# Altium PCB PCB1.PcbDoc (part 2 of 4)
Units mil, origin at the board's own origin, x right, y up, seen from the top; angles counter-clockwise.
Board outline 4724.41 x 4724.41 mil, 4 copper layers (Top Layer, GND, VCC, Bottom Layer); 291 components, 240 nets, 990 pads, 328 vias.
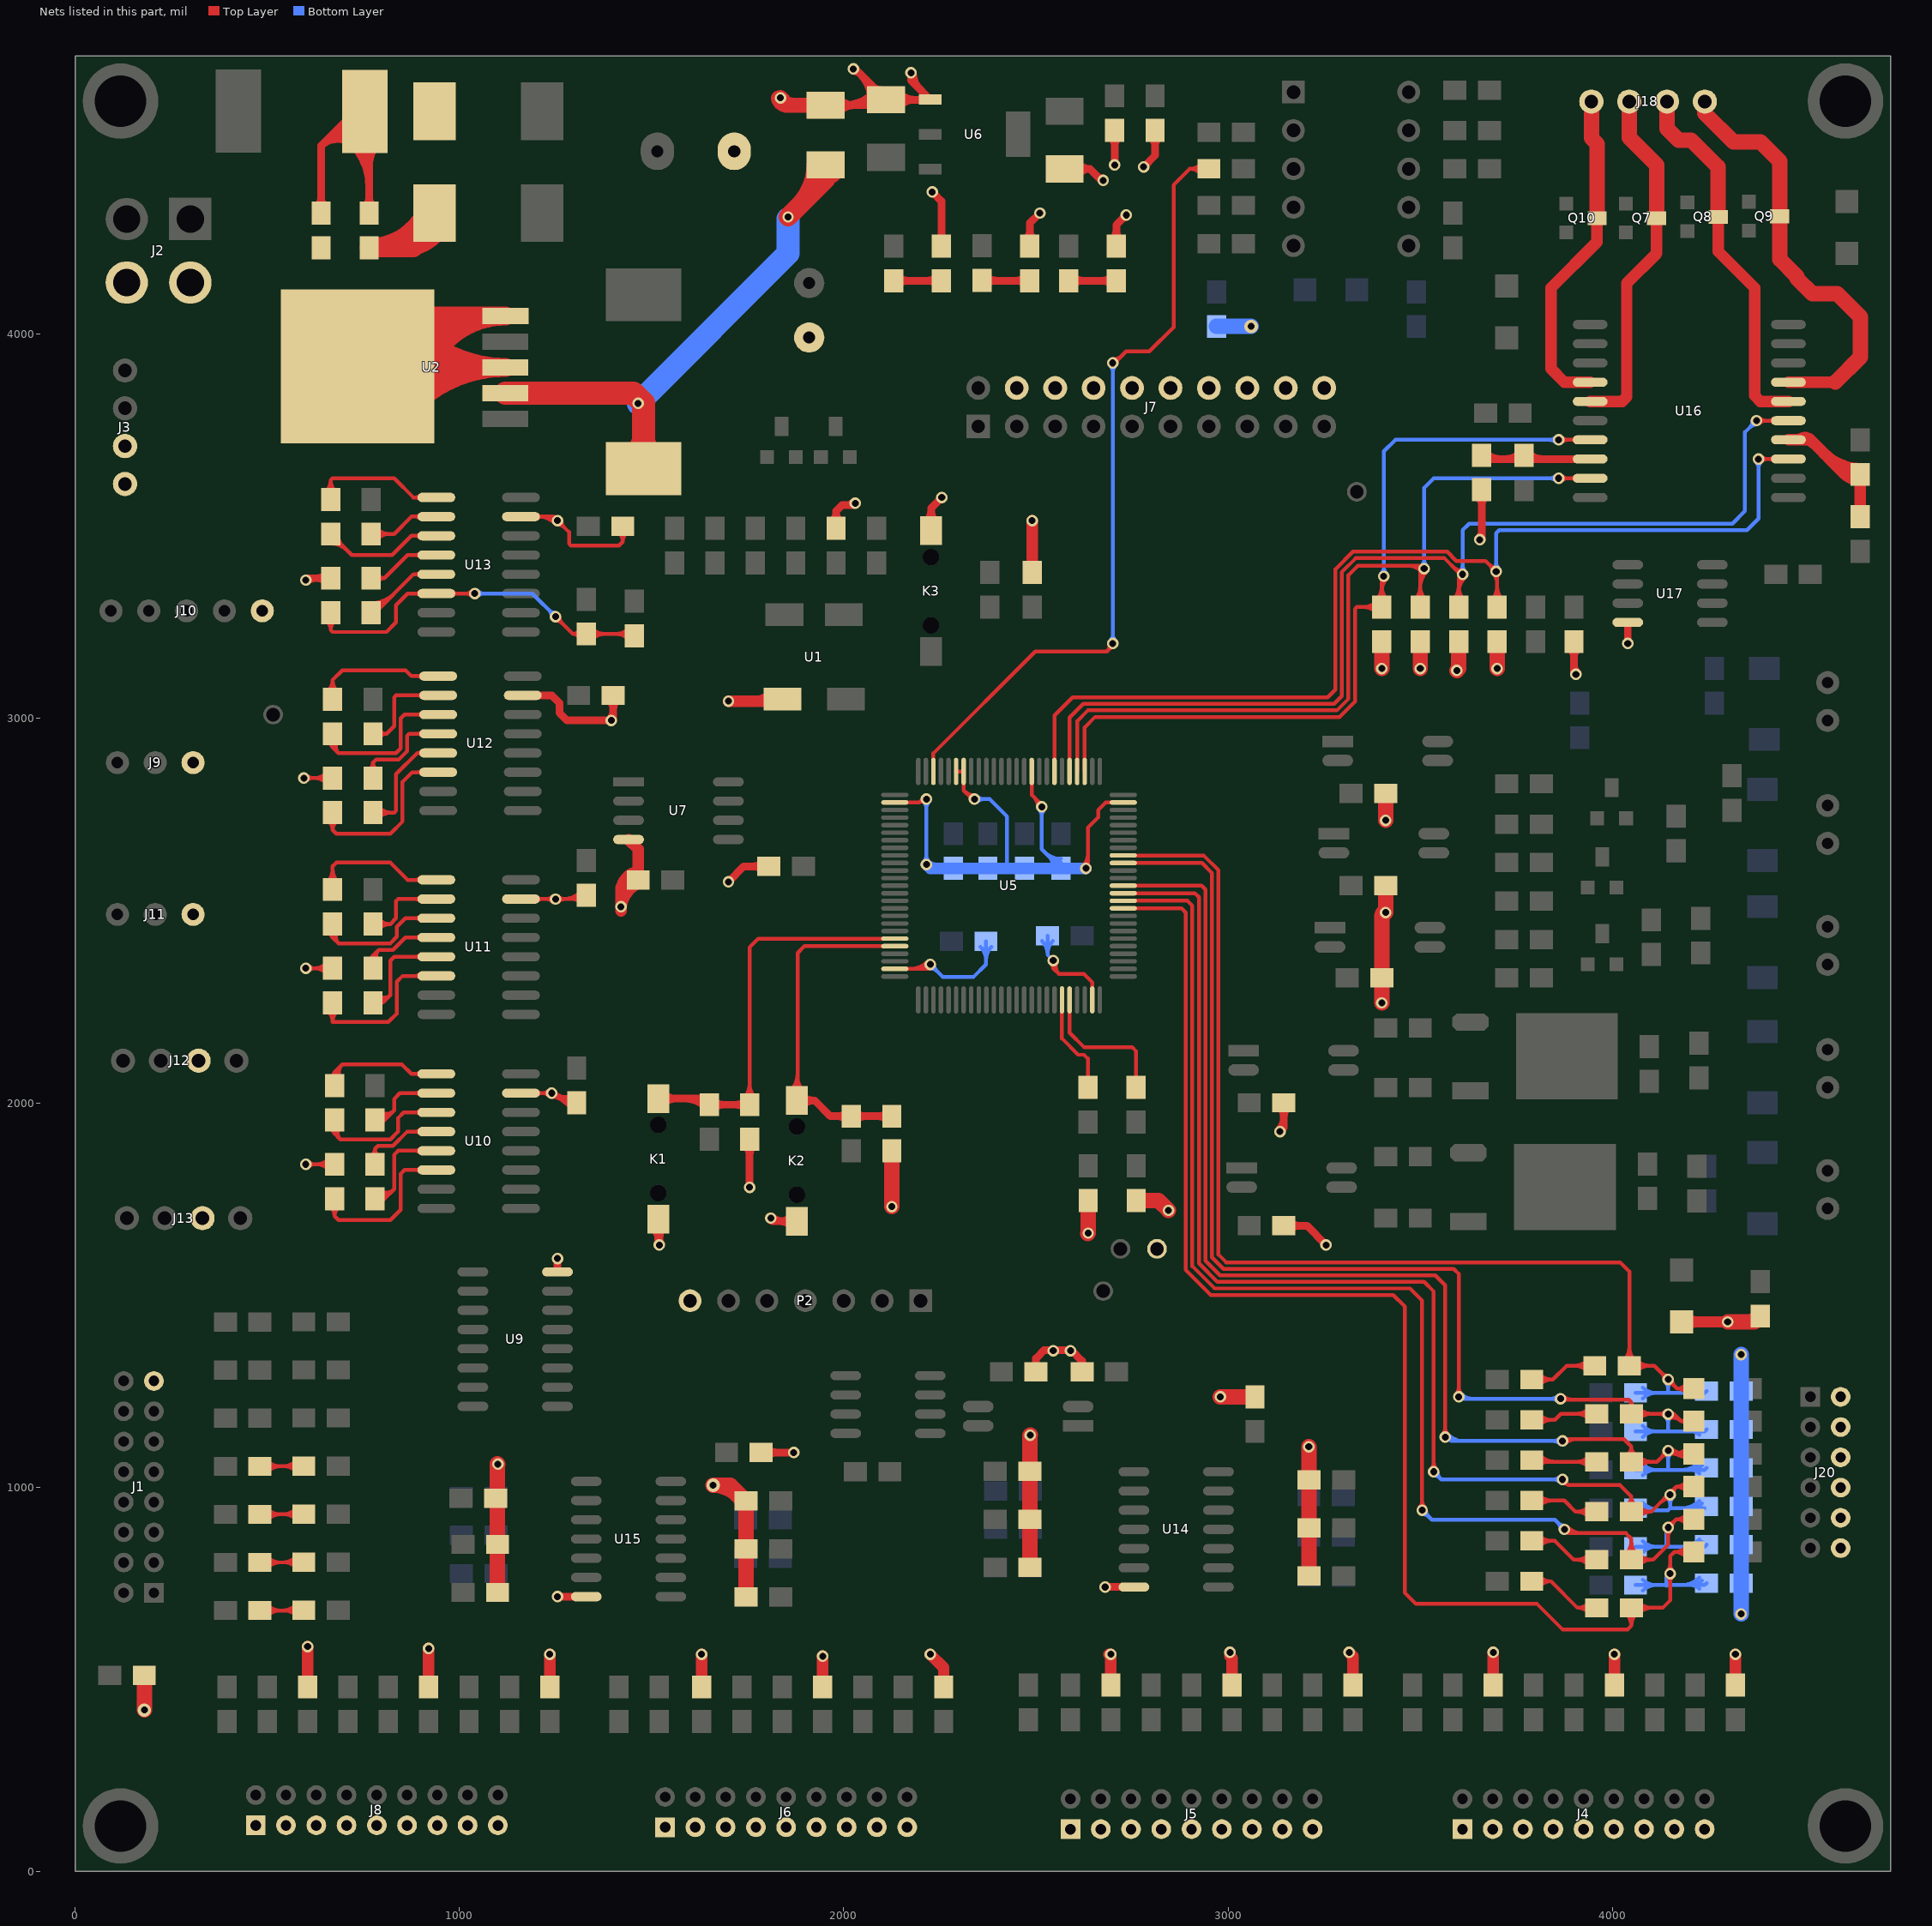
[diagram p4: the nets of this part, all layers, seen from the top]

## Via types
v1: diameter 30, hole 18, Top Layer to Bottom Layer, 301 vias
v2: diameter 35, hole 18, Top Layer to Bottom Layer, 22 vias
v3: diameter 50, hole 28, Top Layer to Bottom Layer, 4 vias
v4: diameter 28, hole 18, Top Layer to Bottom Layer, 1 vias

## Nets (pads, with @x,y where several pads share a name; then routed paths per layer and width w, separated by ;. In a path a pad name is that pad's centre, name@x,y a point inside that pad or via, vN(x,y) a via of type N, cw(c..) or ccw(c..) an arc to the next point about the centre after c; other vN are vias at no path point) (continued)
G: R83.1 U5.23 | length 2217
  Top Layer w10: U5.23@2233.15,2885 2233.15,2909.32 2497.83,3174 2685,3174 ; v1@2690.27,3192.67 cw(c2670.95,3188.05) 2685,3174 ; v1@2700,3189 2685,3174 ; v1@2700,3920 2735,3955 2795,3955 2858,4018 2858,4388 2900,4430 ; v1@2700,3935 ccw(c2700,3971.21) 2725.61,3945.61 ; v1@2710,3925 cw(c2722.07,3925) 2713.54,3933.54 ; R83.1@2930.15,4416.6 ccw(c2900,4389.38) 2900,4430 ; R83.1@2930.15,4443.4 cw(c2900,4470.62) 2900,4430 ; R83.1@2950,4430 2900,4430
  Bottom Layer w10: v1@2692.93,3202.07 ccw(c2675.86,3219.14) 2700,3219.14 ccw(c2724.14,3219.14) v1@2707.07,3202.07 ; v1@2692.93,3917.93 cw(c2675.86,3900.86) 2700,3900.86 cw(c2724.14,3900.86) v1@2707.07,3917.93 ; v1(2700,3195) v1(2700,3925)
GND: C1.2 C2.1 C3.2 C4.2 C5.1 C7.2 C8.2 C9.2 C11.2 C12.2 C14.2 C16.2 C17.2 C18.2 C19.2 C20.2 C21.1 C22.1 C23.1 C24.1 C25.1 C26.2 C27.1 C28.2 C29.2 C38.2 C39.2 C40.2 C41.2 C42.2 C43.2 C44.2 C45.2 C46.2 C47.2 C48.2 C49.2 C51.2 C53.2 C55.2 C57.2 C58.2 C59.2 C60.2 C61.2 C62.2 C63.2 C66.1 C68.2 C69.1 D8.2 D9.2 D10.2 D12.1 D13.1 D22.2 D23.2 D24.2 D25.2 D26.2 D27.2 D28.2 D29.2 D30.2 D31.2 D32.2 D33.2 D50.2 D51.2 J1.15 J2.2 J2.4 J3.3 J3.4 J4.1 J4.3 J4.5 J4.7 J4.9 J4.11 J4.13 J4.15 J4.17 J5.1 J5.3 J5.5 J5.7 J5.9 J5.11 J5.13 J5.15 J5.17 J6.1 J6.3 J6.5 J6.7 J6.9 J6.11 J6.13 J6.15 J6.17 J7.4 J7.6 J7.8 J7.10 J7.12 J7.14 J7.16 J7.18 J7.20 J8.1 J8.3 J8.5 J8.7 J8.9 J8.11 J8.13 J8.15 J8.17 J9.3 J10.5 J11.3 J12.3 J13.3 J20.2 J20.4 J20.6 J20.8 J20.10 J20.12 K1.1 K2.1 K3.1 P2.7 pad.4 R23.2 R24.1 R62.2 R77.2 R78.2 R92.2 R93.2 R94.1 R99.1 R100.1 R101.1 R106.2 R109.2 R111.2 R118.1 U1.2 U2.0 U2.3 U2.5 U5.10 U5.19 U5.20 U5.27 U5.49 U5.74 U5.99 U6.1 U7.4 U9.8 U10.15 U11.15 U12.15 U13.15 U14.7 U15.7 U17.4 | length 19159.7
  Top Layer w10: v1(595,2845) C55.2@670,2845 ; v1(600,1840) C51.2@675,1840 ; v1(600,2350) C53.2@670,2350 ; v1@602.07,2837.93 cw(c619.14,2820.86) 619.14,2845 cw(c619.14,2869.14) v1@602.07,2852.07 ; v1@607.07,1832.93 cw(c624.14,1815.86) 624.14,1840 cw(c624.14,1864.14) v1@607.07,1847.07 ; v1@607.07,2342.93 cw(c624.14,2325.86) 624.14,2350 cw(c624.14,2374.14) v1@607.07,2357.07 ; C53.2@655.86,2335.86 ccw(c621.72,2301.72) 621.72,2350 ccw(c621.72,2398.28) C53.2@655.86,2364.14 ; C55.2@655.86,2830.86 ccw(c621.72,2796.72) 621.72,2845 ccw(c621.72,2893.28) C55.2@655.86,2859.14 ; C51.2@660.86,1825.86 ccw(c626.72,1791.72) 626.72,1840 ccw(c626.72,1888.28) C51.2@660.86,1854.14 ; U10.15@1159.83,2025.14 v1@1249.86,2025.14 ; U11.15@1159.83,2530.14 1320.14,2530.14 C59.2@1330,2540 ; U13.15@1159.83,3525.14 1244.86,3525.14 1285,3485 1285,3455 1290,3450 1415,3450 1425,3460 ; U10.15@1201.99,2020.19 cw(c1213.94,2008.24) 1213.94,2025.14 cw(c1213.94,2042.04) U10.15@1201.99,2030.09 ; U11.15@1201.99,2525.19 cw(c1213.94,2513.24) 1213.94,2530.14 cw(c1213.94,2547.04) U11.15@1201.99,2535.09 ; U13.15@1201.99,3520.19 cw(c1213.94,3508.24) 1213.94,3525.14 cw(c1213.94,3542.04) U13.15@1201.99,3530.09 ; U13.15@1206.37,3525.14 cw(c1206.37,3466.37) v1@1247.93,3507.93 ; 1225.52,2530.14 cw(c1225.52,2505.52) v1@1242.93,2522.93 ; 1226.2,2530.14 ccw(c1226.2,2553.8) v1@1242.93,2537.07 ; 1230.52,3525.14 cw(c1230.52,3490.52) v1(1255,3515) ; v1@1232.93,2018.07 ccw(c1215.86,2001) 1215.86,2025.14 ccw(c1215.86,2049.28) v1@1232.93,2032.21 ; v1@1240,2015.14 cw(c1240,1967.2) 1273.9,2001.1 ; v1(1240,2025.14) cw(c1240,2001.34) 1256.83,2018.17 ; v1@1245.77,2016.98 cw(c1254.82,2004.19) 1262.65,2017.75 ; v1@1255,3505 cw(c1255,3480.86) 1272.07,3497.93 cw(c1289.14,3515) v1@1265,3515 ; v1@1257.07,2522.93 cw(c1274.48,2505.52) 1274.48,2530.14 ; v1@1257.07,2537.07 ccw(c1273.8,2553.8) 1273.8,2530.14 ; 1258.27,2016.73 ccw(c1280.87,2039.33) C58.2@1299.25,2013.18 ; 1266.68,2008.32 ccw(c1287.81,2029.45) C58.2@1305,2005 ; 1269.99,2530.14 ccw(c1269.99,2595.01) C59.2@1315.86,2549.14 ; 1275.09,1999.91 ccw(c1294.76,2019.57) C58.2@1310.75,1996.82 ; C58.2@1286.54,1992.31 ccw(c1275,1987.5) 1275,2000 ; C58.2@1286.54,2007.69 cw(c1275,2012.5) 1275,2000 ; 1293.45,2530.14 cw(c1293.45,2498.45) C59.2@1315.86,2520.86 ; C58.2@1293.5,2021.36 cw(c1273.93,2049.21) v1@1249.86,2025.14 ; 1294.13,2530.14 ccw(c1294.13,2570.87) C59.2@1322.93,2542.07 ; C58.2@1315,2000 1275,2000 ; C61.2@1413,3484 cw(c1395,3460) 1425,3460 ; C61.2@1425,3500 1425,3460 ; C61.2@1437,3484 ccw(c1455,3460) 1425,3460 ; U5.49@2132.76,2348.46 2223.46,2348.46 2225,2350 v1(2225,2360) cw(c2197.15,2387.85) 2197.15,2348.46 ; U5.27@2132.76,2781.54 2196.54,2781.54 ; 2173.01,2348.46 ccw(c2173.01,2411.99) v1@2217.93,2367.07 ; v1@2208.74,2782.2 ccw(c2203.01,2775.06) 2196.54,2781.54 ; v1(2215,2790) 2205,2790 2196.54,2781.54 ; U5.20@2292.2,2862.24 U5.19@2311.89,2862.24 2311.89,2813.11 2335,2790 v1(2340,2790) ; 2314.39,2810.61 ccw(c2340,2836.21) v1@2340,2800 ; 2326.46,2798.54 cw(c2317.93,2790) v1@2330,2790 ; U5.10@2489.06,2862.24 2489.06,2800.94 2515,2775 v1(2515,2770) ; 2494.39,2795.61 cw(c2468.79,2770) v1@2505,2770 ; 2506.46,2783.54 ccw(c2515,2792.07) v1@2515,2780 ; v1@2539,2362 cw(c2530,2350) 2545,2350 ; 2549.64,2345.36 cw(c2565.37,2361.08) v1(2545,2370) 2545,2350 ; v1@2551,2362 ccw(c2560,2350) 2545,2350 ; v1@2554.16,2365.99 ccw(c2579.77,2354.77) 2560,2335 ; v1@2622.93,2617.07 ccw(c2593.79,2646.21) 2635,2646.21 ; v1(2630,2610) 2635,2615 2635,2716 2662,2743 2662,2762 2681.54,2781.54 U5.99@2727.24,2781.54 ; U5.74@2646.54,2267.76 2646.54,2313.41 2624.94,2335 2560,2335 ; v1@1249.86,2025.14 1275,2000 ; 2545,2350 2560,2335
  Top Layer w20: v1(600,3360) 605,3365 C57.2@665,3365 ; v1@603.54,3356.46 cw(c624.14,3335.86) 624.14,3365 ; C57.2@654.39,3354.39 ccw(c628.79,3328.79) 628.79,3365 ccw(c628.79,3401.21) C57.2@654.39,3375.61 ; U12.15@1164.83,3060.14 1239.86,3060.14 1260,3040 1260,3015 1280,2995 1400,2995 C60.2@1400,3060 ; v1(1255,715) U15.7@1330,715 ; U9.8@1255,1560 v1(1255,1595) ; C60.2@1389.39,3049.39 cw(c1363.79,3023.79) 1400,3023.79 cw(c1436.21,3023.79) C60.2@1410.61,3049.39 ; v1@1391.46,2998.54 ccw(c1370.86,3019.14) 1400,3019.14 ; K1.1@1504.74,1674.63 cw(c1473.43,1643.31) 1517.72,1643.31 cw(c1562.01,1643.31) K1.1@1530.69,1674.63 ; v1@1515.67,1632.5 ccw(c1501.55,1640.65) 1517.3,1644.87 ; 1517.72,1647.58 ccw(c1537.58,1647.58) v1@1523.54,1633.54 ; K1.1@1517.72,1696.65 1517.72,1632.28 v1(1520,1630) ; 1521.12,1656 ccw(c1550.7,1648.07) v1@1524.31,1632.54 ; v1(1700,2575) 1740,2615 R24.1@1805,2615 ; C68.2@1744.39,1889.39 cw(c1718.79,1863.79) 1755,1863.79 cw(c1791.21,1863.79) C68.2@1765.61,1889.39 ; v1(1755,1780) C68.2@1755,1905 ; C63.2@1785,1090 v1(1870,1090) ; R24.1@1789.39,2604.39 ccw(c1763.79,2578.79) 1763.79,2615 ccw(c1763.79,2651.21) R24.1@1789.39,2625.61 ; C63.2@1800.61,1079.39 cw(c1826.21,1053.79) 1826.21,1090 cw(c1826.21,1126.21) C63.2@1800.61,1100.61 ; v1(1810,1700) 1810,1695 1813.35,1691.65 K2.1@1877.72,1691.65 ; v1@1813.54,1703.54 ccw(c1842.22,1732.22) 1842.22,1691.65 ; K2.1@1864.74,1678.68 ccw(c1833.43,1647.36) 1833.43,1691.65 ccw(c1833.43,1735.95) K2.1@1864.74,1704.63 ; D12.1@1952.7,4595.6 2095.6,4595.6 C19.2@2110,4610 ; R62.2@1969.39,3510.61 ccw(c1943.79,3536.21) 1980,3536.21 ccw(c2016.21,3536.21) R62.2@1990.61,3510.61 ; R62.2@1980,3495 1980,3540 1995,3555 2025,3555 v1(2030,3560) ; D12.1@1985.38,4577.92 cw(c2028.06,4535.24) 2028.06,4595.6 cw(c2028.06,4655.96) D12.1@1985.38,4613.28 ; D12.1@2000.06,4595.6 ccw(c2000.06,4706.16) C19.2@2078.24,4627.98 ; 2005.86,3555 ccw(c2005.86,3584.14) v1@2026.46,3563.54 ; v1@2025,4685 cw(c2025,4660.86) 2042.07,4677.93 ; v1(2025,4690) 2030,4690 C19.2@2110,4610 ; 2043.06,4676.94 cw(c1976.12,4610) C19.2@2070.79,4610 ; 2048.35,4595.6 ccw(c2048.35,4657.87) C19.2@2092.38,4613.84 ; C19.2@2076.33,4643.67 ccw(c2096.22,4663.56) C19.2@2096.22,4635.43 ; C19.2@2077.2,4642.8 cw(c2044.41,4610) C19.2@2090.79,4610 ; C19.2@2141.77,4592.01 cw(c2185.18,4548.6) 2185.18,4610 cw(c2185.18,4671.4) C19.2@2141.77,4627.98 ; v1(2175,4680) 2175,4660.55 U6.1@2225,4610.55 2224.45,4610 C19.2@2110,4610 ; v1@2180,4680 ccw(c2239.02,4680) 2197.29,4638.26 ; 2201.75,4633.81 cw(c2178.49,4610.55) U6.1@2211.38,4610.55 ; K3.1@2214.31,3510.37 ccw(c2182.99,3541.69) 2227.28,3541.69 ccw(c2271.57,3541.69) K3.1@2240.26,3510.37 ; K3.1@2227.28,3488.35 2227.28,3547.28 v1(2255,3575) ; v1(2230,4370) 2254.09,4345.91 D10.2@2254.09,4229.07 ; D8.2@2473.48,4244.68 ccw(c2447.87,4270.28) 2484.09,4270.28 ccw(c2520.3,4270.28) D8.2@2494.69,4244.68 ; D8.2@2484.09,4229.07 2484.09,4289.09 v1(2510,4315) ; R118.1@2500,1300 2500,1335 2521.5,1356.5 2591.5,1356.5 2620,1328 R23.2@2620,1300 ; C18.2@2575,4430 2640,4430 ; C18.2@2609.04,4414.63 cw(c2640,4391.15) 2640,4430 ; C18.2@2609.04,4445.37 ccw(c2640,4468.86) 2640,4430 ; 2657.93,4412.07 ccw(c2675,4429.14) v1@2675,4405 ; v1(2675,4400) 2675,4395 2640,4430 ; v1(2680,740) U14.7@2755,740 ; C20.2@2694.39,4514.39 cw(c2668.79,4488.79) 2705,4488.79 cw(c2741.21,4488.79) C20.2@2715.61,4514.39 ; D9.2@2698.48,4244.68 ccw(c2672.87,4270.28) 2709.09,4270.28 ccw(c2745.3,4270.28) D9.2@2719.69,4244.68 ; v1(2705,4440) C20.2@2705,4530 ; D9.2@2709.09,4229.07 2709.09,4284.09 v1(2735,4310) ; v1(2780,4435) 2810,4465 C26.2@2810,4530 ; C26.2@2799.39,4514.39 cw(c2773.79,4488.79) 2810,4488.79 cw(c2846.21,4488.79) C26.2@2820.61,4514.39 ; v1@3131.46,1928.54 ccw(c3098.79,1961.21) 3145,1961.21 ; R93.2@3134.39,1989.39 cw(c3108.79,1963.79) 3145,1963.79 cw(c3181.21,1963.79) R93.2@3155.61,1989.39 ; v1(3135,1925) 3145,1935 R93.2@3145,2000 ; R109.2@3145,1680 3205,1680 v1(3255,1630) ; R109.2@3160.61,1669.39 cw(c3186.21,1643.79) 3186.21,1680 cw(c3186.21,1716.21) R109.2@3160.61,1690.61 ; C66.1@3649.39,3579.39 cw(c3623.79,3553.79) 3660,3553.79 cw(c3696.21,3553.79) C66.1@3670.61,3579.39 ; v1@3651.46,3468.54 ccw(c3630.86,3489.14) 3660,3489.14 ; v1(3655,3465) 3660,3465 C66.1@3660,3595 ; R111.2@3889.39,3184.39 cw(c3863.79,3158.79) 3900,3158.79 cw(c3936.21,3158.79) R111.2@3910.61,3184.39 ; 3900,3139.14 ccw(c3929.14,3139.14) v1@3908.54,3118.54 ; R111.2@3900,3200 3900,3115 v1(3905,3115) ; v1(4040,3195) U17.4@4040,3250
  Top Layer w30: C41.2@605,480 v1(605,585) ; C49.2@920,480 v1(920,580) ; C45.2@1235,480 v1(1235,565) ; v1@1420,2499.38 cw(c1500,2499.38) C29.2@1464.44,2571.04 ; v1(1420,2510) 1420,2560 ; 1420,2547.75 cw(c1476,2547.75) C29.2@1451.11,2597.92 ; U7.4@1440,2685 1465,2660 C29.2@1465,2580 1440,2580 1420,2560 ; C29.2@1457.53,2570.31 ccw(c1447.82,2532.18) 1420,2560 ; C40.2@1630,480 v1(1630,565) ; v1(1700,3045) 1835.41,3045 U1.2@1840.48,3050.07 ; 1773.48,3045 ccw(c1773.48,3097.39) U1.2@1810.52,3060.34 ; C48.2@1945,480 v1(1945,560) ; v1(2225,565) 2260,530 C44.2@2260,480 ; C2.1@2490,3380 v1(2490,3515) ; C39.2@2695,485 2695,560 2690,565 v1(2695,565) ; v1(3005,570) 3005,560 3010,555 C47.2@3010,485 ; C43.2@3325,485 3325,560 v1(3315,570) cw(c3290.86,545.86) 3325,545.86 ; C38.2@3690,485 v1(3690,570) ; C46.2@4005,485 v1(4005,565) ; R106.2@4180,1430 v1(4300,1430) ; R106.2@4190.61,1419.39 cw(c4216.21,1393.79) 4216.21,1430 cw(c4216.21,1466.21) R106.2@4190.61,1440.61 ; C42.2@4320,485 v1(4320,565)
  Top Layer w40: v2(180,420) C8.2@180,510 ; D31.2@1099.07,725.91 D32.2@1099.07,850.91 1099.07,1060.93 v1(1100,1060) ; D28.2@1736.64,961.52 ccw(c1660,915.72) v2(1660,1005) 1705.02,1005 D28.2@1745.93,964.09 D29.2@1745.93,839.09 D30.2@1745.93,714.09 ; v1@1830.21,4613.55 ccw(c1854.4,4620.87) 1854.4,4595.6 ; v1@1831.46,4611.46 ccw(c1869.76,4649.76) 1869.76,4595.6 ; v1(1835,4615) 1854.4,4595.6 ; D12.1@1927.09,4584.99 ccw(c1901.49,4559.39) 1901.49,4595.6 ccw(c1901.49,4631.81) D12.1@1927.09,4606.21 ; D12.1@1952.7,4595.6 1854.4,4595.6 ; v1(2125,1730) C28.2@2125,1875 ; D25.2@2484.07,790.91 D26.2@2484.07,915.91 D27.2@2484.07,1040.91 2484.07,1134.07 v1(2485,1135) ; v1@2635,1660 v1(2635.91,1660.91) D51.2@2635.91,1745.93 ; D50.2@2760.91,1745.93 2819.07,1745.93 v1(2845,1720) ; v1(2980,1235) C62.2@3070,1235 ; v1(3210,1105) 3210.93,1104.07 D22.2@3210.93,1019.09 D23.2@3210.93,894.09 D24.2@3210.93,769.09 ; v1(3400,2260) R92.2@3400,2325 3400,2485 v1(3410,2495) R78.2@3410,2565 ; 3400,2482.93 cw(c3422.07,2482.93) v1@3406.46,2498.54 ; v1(3400,3130) R94.1@3400,3200 ; v1(3410,2735) R77.2@3410,2805 ; v1(3500,3130) R99.1@3500,3200 ; v1(3595,3125) 3600,3130 R101.1@3600,3200 ; v1(3700,3130) R100.1@3700,3200 ; v1(4300,1430) 4370,1430 C69.1@4385,1445 ; 4348.79,1430 ccw(c4348.79,1476.21) C69.1@4381.46,1443.54
  Top Layer w50: U2.0@759.36,3910.4 cw(c931.33,3870.88) U2.0@931.33,4047.32 ; U2.0@808.09,3899.2 cw(c994.12,3856.44) 994.12,4047.32 ; U2.0@828.34,3832.86 cw(c1007.9,3672.93) 1007.9,3913.39 ; U2.0@830.19,3997.01 ccw(c1011.18,4151.05) 1011.18,3913.39 ; 850.12,4225 ccw(c850.12,4342.72) D13.1@952.95,4285.4 ; U2.0@856.82,3888 cw(c1056.92,3842.01) 1056.92,4047.32 ; U2.0@865.68,3799.61 cw(c1119.39,3573.63) U2.3@1119.41,3913.39 ; U2.0@868.27,4029.42 ccw(c1119.39,4243.14) U2.3@1119.41,3913.39 ; U2.0@905.55,3876.8 cw(c1119.71,3827.58) U2.5@1119.72,4047.32 866.32,4047.32 U2.0@735,3916 737.61,3913.39 U2.3@1119.41,3913.39 ; D13.1@905.55,4293.11 cw(c817.85,4287.16) 880,4225 ; D13.1@909.28,4309.75 cw(c765.01,4390.17) C12.2@765,4225 880,4225 ; D13.1@935.48,4315.14 935.48,4280.48 880,4225
  Bottom Layer w10: v1@2207.93,2627.07 ccw(c2190.86,2644.14) 2215,2644.14 ccw(c2239.14,2644.14) v1@2222.07,2627.07 ; v1@2207.93,2782.93 cw(c2190.86,2765.86) 2215,2765.86 cw(c2239.14,2765.86) v1@2222.07,2782.93 ; v1(2215,2790) v1(2215,2620) v1@2225,2610 ; v1@2225,2350 cw(c2225,2325.86) 2242.07,2342.93 cw(c2259.14,2360) v1@2235,2360 ; v1(2225,2360) 2257,2328 2338,2328 2370,2360 C1.2@2370,2420 ; v1(2340,2790) 2380,2790 2425,2745 2425,2620 2415,2610 ; v1@2347.07,2782.93 cw(c2364.14,2765.86) 2364.14,2790 cw(c2364.14,2814.14) v1@2347.07,2797.07 ; C1.2@2355.86,2405.86 cw(c2321.72,2371.72) 2370,2371.72 cw(c2418.28,2371.72) C1.2@2384.14,2405.86 ; v1@2507.93,2762.93 cw(c2490.86,2745.86) 2515,2745.86 cw(c2539.14,2745.86) v1@2522.07,2762.93 ; v1(2515,2770) 2515,2660 C14.2@2565,2610 ; C3.2@2515.86,2420.86 cw(c2481.72,2386.72) 2530,2386.72 cw(c2578.28,2386.72) C3.2@2544.14,2420.86 ; 2522.32,2652.68 ccw(c2565,2695.36) C14.2@2565,2635 ; C3.2@2530,2435 2530,2385 v1(2545,2370) ; 2534.39,2640.61 cw(c2508.79,2615) C14.2@2545,2615 ; 2539.39,2635.61 ccw(c2565,2661.21) C14.2@2565,2625
  Bottom Layer w30: v1(2215,2620) ccw(c2239.14,2644.14) 2239.14,2610 ; v1@2225,2610 C9.2@2285,2610 C11.2@2375,2610 2415,2610 C5.1@2470,2610 C14.2@2565,2610 v1(2630,2610)
  Bottom Layer w40: C4.2@2970,4020 v2(3060,4020) ; v1(4335,670) C22.1@4335,850 C23.1@4335,950 C24.1@4335,1050 C25.1@4335,1150 C27.1@4335,1250 v1(4335,1345)
  other v1: 2545,1355 2590,1355 1250,2530 1395,2995
HEARTBEAT1: R117.1 U5.70 | length 264.4
  Top Layer w10: U5.70@2567.8,2267.76 2567.8,2167.2 2610,2125 2625,2125 2635,2115 R117.1@2635,2040
HEARTBEAT2: R116.1 U5.71 | length 372.4
  Top Layer w10: U5.71@2587.48,2267.76 2587.48,2182.52 2625,2145 2750,2145 2760,2135 R116.1@2760,2040
IN1: C21.2 D2.2 D44.A R1.2 U5.85 | length 4215.4
  Top Layer w10: U5.85@2727.24,2505.94 2879.06,2505.94 2890,2495 2890,1565 2955,1500 3430,1500 3460,1470 3460,725 3489,696 3804,696 3870,630 4040,630 4049.07,639.07 ; D2.2@4035.24,671.47 cw(c4004.22,639.07) 4049.07,639.07 ; D2.2@4062.9,671.47 ccw(c4093.92,639.07) 4049.07,639.07 ; D2.2@4068.21,671.77 cw(c4102.36,637.63) 4102.36,685.91 cw(c4102.36,734.2) D2.2@4068.21,700.06 ; v1@4142.93,767.93 cw(c4125.86,750.86) 4150,750.86 cw(c4174.14,750.86) v1@4157.07,767.93 ; v1@4142.93,782.07 ccw(c4125.86,799.14) 4150,799.14 ccw(c4174.14,799.14) v1@4157.07,782.07 ; D44.A@4194.73,816.4 ccw(c4161.38,786.79) 4161.38,831.38 ; D44.A@4194.73,846.36 cw(c4161.38,875.98) 4161.38,831.38 ; D44.A@4202.2,823.04 ccw(c4183.64,806.55) 4183.64,831.38 ccw(c4183.64,856.21) D44.A@4202.2,839.72 ; D44.A@4211.59,831.38 4161.38,831.38 ; 4049.07,639.07 D2.2@4049.07,685.91 4130.91,685.91 4150,705 v1(4150,775) 4150,820 4161.38,831.38
  Bottom Layer w10: R1.2@4060,745 4140,745 ; R1.2@4079.14,730.86 cw(c4113.28,696.72) 4113.28,745 cw(c4113.28,793.28) R1.2@4079.14,759.14 ; 4140,743.38 cw(c4165,743.38) v1@4154.29,765.96 ; 4140,759.19 cw(c4157.5,759.19) v1(4150,775) 4140,765 4140,745 ; 4179.64,745 ccw(c4179.64,810.36) C21.2@4225.86,764.14 ; C21.2@4225.86,735.86 ccw(c4203.79,713.79) 4203.79,745 ccw(c4203.79,786.21) C21.2@4232.93,757.07 ; C21.2@4245,750 4240,745 4140,745
IN2: C22.2 D3.2 D45.A R2.2 U5.86 | length 4098.1
  Top Layer w10: U5.86@2727.24,2525.63 2894.37,2525.63 2907,2513 2907,1574.92 2964.92,1517 3473,1517 3505,1485 v1(3505,940) ; v1@3497.93,947.07 ccw(c3480.86,964.14) 3505,964.14 ccw(c3529.14,964.14) v1@3512.07,947.07 ; v1@3882.07,897.07 ccw(c3923.28,938.28) 3923.28,880 ; 3899.14,880 cw(c3899.14,914.14) v1(3875,890) 3885,880 4035,880 4049.07,865.93 D3.2@4049.07,810.91 4105.91,810.91 4145,850 v1(4145,895) 4166.38,916.38 ; D3.2@4034.93,825.06 ccw(c4000.79,859.2) 4049.07,859.2 ccw(c4097.36,859.2) D3.2@4063.21,825.06 ; D3.2@4068.21,796.77 cw(c4102.36,762.63) 4102.36,810.91 cw(c4102.36,859.2) D3.2@4068.21,825.06 ; v1@4137.93,887.93 cw(c4120.86,870.86) 4145,870.86 cw(c4169.14,870.86) v1@4152.07,887.93 ; v1@4145,905 ccw(c4145,929.14) 4162.07,912.07 ccw(c4179.14,895) v1@4155,895 ; D45.A@4193.57,902.82 ccw(c4166.38,882.36) 4166.38,916.38 ; D45.A@4193.57,929.95 cw(c4166.38,950.4) 4166.38,916.38 ; D45.A@4211.59,916.38 4166.38,916.38
  Bottom Layer w10: v1@3505,930 cw(c3505,905.86) 3522.07,922.93 cw(c3539.14,940) v1@3515,940 ; v1(3505,940) 3530,915 3850,915 v1(3875,890) ; v1@3865,890 ccw(c3840.86,890) 3857.93,907.07 ccw(c3875,924.14) v1@3875,900 ; R2.2@4060,845 4140,845 ; R2.2@4079.14,830.86 cw(c4113.28,796.72) 4113.28,845 cw(c4113.28,893.28) R2.2@4079.14,859.14 ; 4140,858.79 cw(c4181.21,858.79) v1@4152.07,887.93 ; v1(4145,895) 4140,890 4140,845 ; 4179.64,845 ccw(c4179.64,910.36) C22.2@4225.86,864.14 ; C22.2@4225.86,835.86 ccw(c4203.79,813.79) 4203.79,845 ccw(c4203.79,886.21) C22.2@4232.93,857.07 ; C22.2@4245,850 4240,845 4140,845
IN3: C23.2 D4.2 D46.A R3.2 U5.87 | length 3925.7
  Top Layer w10: U5.87@2727.24,2545.32 2913.69,2545.32 2924,2535 2924,1581.96 2971.96,1534 3510,1534 3535,1509 v1(3535,1040) ; v1@3527.93,1047.07 ccw(c3510.86,1064.14) 3535,1064.14 ccw(c3559.14,1064.14) v1@3542.07,1047.07 ; v1(3870,1020) 3870,1015 3875,1015 3885,1005 ; v1@3870.96,1010.05 cw(c3872.63,992.63) 3885,1005 ; v1@3879.95,1019.04 ccw(c3897.37,1017.37) 3885,1005 ; D4.2@4037.07,951.91 ccw(c4019.04,975.93) 4049.07,975.93 ; D4.2@4061.08,951.91 cw(c4079.1,975.93) 4049.07,975.93 ; D4.2@4068.52,922.08 cw(c4100.91,891.06) 4100.91,935.91 ; D4.2@4068.52,949.75 ccw(c4100.91,980.76) 4100.91,935.91 ; 4124.39,959.39 cw(c4150,933.79) v1@4150,970 ; 4136.46,971.46 ccw(c4127.93,980) v1@4140,980 ; v1@4150,990 ccw(c4150,1002.07) 4158.54,993.54 ; v1@4159.88,981.52 cw(c4182.72,985.04) 4166.38,1001.38 ; D46.A@4193.57,987.82 ccw(c4166.38,967.36) 4166.38,1001.38 ; D46.A@4193.57,1014.95 cw(c4166.38,1035.4) 4166.38,1001.38 ; D46.A@4211.59,1001.38 4166.38,1001.38 ; 3885,1005 4020,1005 4049.07,975.93 ; 4049.07,975.93 D4.2@4049.07,935.91 4100.91,935.91 ; 4100.91,935.91 4166.38,1001.38
  Bottom Layer w10: v1@3535,1030 cw(c3535,1005.86) 3552.07,1022.93 cw(c3569.14,1040) v1@3545,1040 ; v1(3535,1040) 3555,1020 v1(3870,1020) ; v1@3862.93,1012.93 ccw(c3845.86,995.86) 3845.86,1020 ccw(c3845.86,1044.14) v1@3862.93,1027.07 ; R3.2@4060,945 4080,945 4075,940 4145,940 4150,945 ; R3.2@4072.07,952.07 ccw(c4101.21,981.21) 4101.21,940 ccw(c4101.21,908.79) R3.2@4079.14,930.86 ; R3.2@4079.14,959.14 ccw(c4125.36,1005.36) 4125.36,940 ; v1@4142.93,972.93 cw(c4125.86,955.86) 4150,955.86 cw(c4174.14,955.86) v1@4157.07,972.93 ; v1(4150,980) 4150,945 ; 4179.64,945 ccw(c4179.64,1010.36) C23.2@4225.86,964.14 ; C23.2@4225.86,935.86 ccw(c4203.79,913.79) 4203.79,945 ccw(c4203.79,986.21) C23.2@4232.93,957.07 ; C23.2@4240,945 4150,945
IN4: C24.2 D5.2 D47.A R4.2 U5.88 | length 3979.1
  Top Layer w10: U5.88@2727.24,2565 2931,2565 2941,2555 2941,1589 2979,1551 3539,1551 3565,1525 v1(3565,1130) ; v1@3557.93,1137.07 ccw(c3540.86,1154.14) 3565,1154.14 ccw(c3589.14,1154.14) v1@3572.07,1137.07 ; v1(3870,1120) 3875,1125 4030,1125 4049.07,1105.93 ; v1@3877.07,1112.93 cw(c3906.21,1083.79) 3906.21,1125 ; D5.2@4037.07,1081.91 ccw(c4019.04,1105.93) 4049.07,1105.93 ; D5.2@4061.08,1081.91 cw(c4079.1,1105.93) 4049.07,1105.93 ; D5.2@4068.21,1051.77 cw(c4102.36,1017.63) 4102.36,1065.91 cw(c4102.36,1114.2) D5.2@4068.21,1080.06 ; v1@4135,1095 cw(c4110.86,1095) 4127.93,1077.93 cw(c4145,1060.86) v1@4145,1085 ; v1(4145,1095) ccw(c4165.81,1115.81) 4165.81,1086.38 ; v1@4152.07,1102.07 ccw(c4189.95,1139.95) D47.A@4189.95,1086.38 ; v1@4153.66,1100 ccw(c4189.9,1120.92) 4179.07,1080.5 ; D47.A@4195.64,1070.43 ccw(c4157.13,1031.92) 4157.13,1086.38 ccw(c4157.13,1140.84) D47.A@4195.64,1102.33 ; D47.A@4202.71,1077.5 ccw(c4181.27,1056.06) 4181.27,1086.38 ccw(c4181.27,1116.7) D47.A@4202.71,1095.26 ; D47.A@4211.59,1086.38 4136.38,1086.38 4115.91,1065.91 D5.2@4049.07,1065.91 4049.07,1105.93
  Bottom Layer w10: v1@3572.07,1137.07 ccw(c3613.28,1178.28) 3613.28,1120 ; 3589.14,1120 cw(c3589.14,1154.14) v1(3565,1130) 3570,1130 3580,1120 v1(3870,1120) ; v1@3862.93,1112.93 ccw(c3845.86,1095.86) 3845.86,1120 ccw(c3845.86,1144.14) v1@3862.93,1127.07 ; R4.2@4060,1045 4145,1045 ; R4.2@4079.14,1030.86 cw(c4113.28,996.72) 4113.28,1045 cw(c4113.28,1093.28) R4.2@4079.14,1059.14 ; v1@4137.93,1087.93 cw(c4120.86,1070.86) 4145,1070.86 cw(c4169.14,1070.86) v1@4152.07,1087.93 ; v1(4145,1095) 4145,1045 ; 4179.64,1045 ccw(c4179.64,1110.36) C24.2@4225.86,1064.14 ; C24.2@4225.86,1035.86 ccw(c4203.79,1013.79) 4203.79,1045 ccw(c4203.79,1086.21) C24.2@4232.93,1057.07 ; C24.2@4245,1050 4240,1045 4145,1045
IN5: C25.2 D6.2 D48.A R5.2 U5.91 | length 3707.8
  Top Layer w10: U5.91@2727.24,2624.06 2931.9,2624.06 2958,2597.96 2958,1597.96 2987.96,1568 3587,1568 3600,1555 v1(3600,1235) ; v1@3592.93,1242.07 ccw(c3575.86,1259.14) 3600,1259.14 ccw(c3624.14,1259.14) v1@3607.07,1242.07 ; v1(3865,1230) 3867.09,1227.91 4042.09,1227.91 4049.07,1220.93 ; v1@3872.07,1222.93 cw(c3884.11,1210.89) 3884.11,1227.91 ; v1@3872.07,1237.07 ccw(c3894.18,1259.18) 3894.18,1227.91 ; D6.2@4041.37,1209.37 ccw(c4036.55,1220.93) 4049.07,1220.93 ; D6.2@4056.77,1209.37 cw(c4061.59,1220.93) 4049.07,1220.93 ; D6.2@4068.21,1176.77 cw(c4102.36,1142.63) 4102.36,1190.91 cw(c4102.36,1239.2) D6.2@4068.21,1205.06 ; 4118.65,1190.91 cw(c4118.65,1163.65) v1@4137.93,1182.93 ; 4123.06,1190.91 ccw(c4123.06,1211.94) v1@4137.93,1197.07 ; v1(4145,1190) cw(c4150.15,1168.26) 4165.94,1184.06 ; v1@4147.3,1180.27 cw(c4155,1147.76) 4178.62,1171.38 ; D48.A@4190.57,1163.21 ccw(c4178.62,1158.56) 4178.62,1171.38 ; D48.A@4190.57,1179.55 cw(c4178.62,1184.2) 4178.62,1171.38 ; D48.A@4211.59,1171.38 4178.62,1171.38 ; 4049.07,1220.93 D6.2@4049.07,1190.91 4159.09,1190.91 4178.62,1171.38
  Bottom Layer w10: v1(3600,1235) 3605,1230 v1(3865,1230) ; v1@3607.07,1242.07 ccw(c3636.21,1271.21) 3636.21,1230 ; v1@3857.93,1222.93 ccw(c3840.86,1205.86) 3840.86,1230 ccw(c3840.86,1254.14) v1@3857.93,1237.07 ; R5.2@4060,1145 4145,1145 ; R5.2@4079.14,1130.86 cw(c4113.28,1096.72) 4113.28,1145 cw(c4113.28,1193.28) R5.2@4079.14,1159.14 ; v1@4137.93,1182.93 cw(c4120.86,1165.86) 4145,1165.86 cw(c4169.14,1165.86) v1@4152.07,1182.93 ; v1(4145,1190) 4145,1145 ; 4179.64,1145 ccw(c4179.64,1210.36) C25.2@4225.86,1164.14 ; C25.2@4225.86,1135.86 ccw(c4203.79,1113.79) 4203.79,1145 ccw(c4203.79,1186.21) C25.2@4232.93,1157.07 ; C25.2@4245,1150 4240,1145 4145,1145
IN6: C27.2 D7.2 D49.A R6.2 U5.92 | length 3517.2
  Top Layer w10: U5.92@2727.24,2643.74 2936.26,2643.74 2975,2605 2975,1605 2995,1585 4020,1585 4044.07,1560.93 D7.2@4044.07,1315.91 4109.09,1315.91 v1(4145,1280) 4168.62,1256.38 ; D7.2@4029.93,1330.06 ccw(c3995.79,1364.2) 4044.07,1364.2 ccw(c4092.36,1364.2) D7.2@4058.21,1330.06 ; D7.2@4063.21,1301.77 cw(c4097.36,1267.63) 4097.36,1315.91 cw(c4097.36,1364.2) D7.2@4063.21,1330.06 ; v1@4135,1280 ccw(c4110.86,1280) 4127.93,1297.07 ccw(c4145,1314.14) v1@4145,1290 ; v1@4145,1270 cw(c4145,1245.86) 4162.07,1262.93 cw(c4179.14,1280) v1@4155,1280 ; D49.A@4193.02,1243.57 ccw(c4168.62,1226.73) 4168.62,1256.38 ; D49.A@4193.02,1269.19 cw(c4168.62,1286.03) 4168.62,1256.38 ; D49.A@4211.59,1256.38 4168.62,1256.38
  Bottom Layer w10: R6.2@4060,1245 4145,1245 ; R6.2@4079.14,1230.86 cw(c4113.28,1196.72) 4113.28,1245 cw(c4113.28,1293.28) R6.2@4079.14,1259.14 ; v1@4137.93,1272.93 cw(c4120.86,1255.86) 4145,1255.86 cw(c4169.14,1255.86) v1@4152.07,1272.93 ; v1(4145,1280) 4145,1245 ; 4179.64,1245 ccw(c4179.64,1310.36) C27.2@4225.86,1264.14 ; C27.2@4225.86,1235.86 ccw(c4203.79,1213.79) 4203.79,1245 ccw(c4203.79,1286.21) C27.2@4232.93,1257.07 ; C27.2@4245,1250 4240,1245 4145,1245
KEY1: C68.1 K1.2 R8.2 U5.45 | length 1357.5
  Top Layer w10: C68.1@1740.86,2014.14 ccw(c1706.72,2048.28) 1755,2048.28 ccw(c1803.28,2048.28) C68.1@1769.14,2014.14 ; C68.1@1755,1995 1755,2405 1777.2,2427.2 U5.45@2132.76,2427.2
  Top Layer w20: K1.2@1517.72,2010.83 1634.17,2010.83 R8.2@1650,1995 C68.1@1755,1995 ; K1.2@1530.69,1997.85 cw(c1562.01,1966.54) 1562.01,2010.83 cw(c1562.01,2055.12) K1.2@1530.69,2023.8 ; 1587.65,2010.83 cw(c1587.65,1937.65) R8.2@1639.39,1989.39 ; R8.2@1660.61,1984.39 cw(c1686.21,1958.79) 1686.21,1995 cw(c1686.21,2031.21) R8.2@1660.61,2005.61 ; C68.1@1744.39,1984.39 ccw(c1718.79,1958.79) 1718.79,1995 ccw(c1718.79,2031.21) C68.1@1744.39,2005.61
KEY2: C28.1 K2.2 R7.2 U5.46 | length 1269.5
  Top Layer w10: K2.2@1861.21,2031.39 ccw(c1815.84,2076.76) 1880,2076.76 ; K2.2@1868.28,2024.32 ccw(c1839.99,2052.61) 1880,2052.61 ; K2.2@1877.72,2005.83 1880,2008.11 1880,2390 1897.52,2407.52 U5.46@2132.76,2407.52 ; 1880,2065.73 ccw(c1928.57,2065.73) K2.2@1894.23,2031.39
  Top Layer w20: K2.2@1877.72,2005.83 1924.17,2005.83 1965,1965 R7.2@2020,1965 C28.1@2125,1965 ; K2.2@1890.69,1992.85 cw(c1922.01,1961.54) 1922.01,2005.83 cw(c1922.01,2050.12) K2.2@1890.69,2018.8 ; R7.2@2009.39,1954.39 ccw(c1983.79,1928.79) 1983.79,1965 ccw(c1983.79,2001.21) R7.2@2009.39,1975.61 ; R7.2@2030.61,1954.39 cw(c2056.21,1928.79) 2056.21,1965 cw(c2056.21,2001.21) R7.2@2030.61,1975.61 ; C28.1@2114.39,1954.39 ccw(c2088.79,1928.79) 2088.79,1965 ccw(c2088.79,2001.21) C28.1@2114.39,1975.61
MOTOR1+: J18.4 Q10.3 U16.4 | length 867.8
  Top Layer w30: U16.4@3942.13,3875 3875,3875 3840,3910 3840,4120 3960.14,4240.14 Q10.3@3960.14,4301.52
  Top Layer w40: J18.4@3945.25,4605.2 3945.25,4509.89 3960.14,4495 Q10.3@3960.14,4301.52
MOTOR1-: J18.3 Q7.3 U16.5 | length 930
  Top Layer w30: U16.5@3942.13,3825 4025,3825 4037.25,3837.25 4037.25,4132.25 4115.14,4210.14 Q7.3@4115.14,4301.52
  Top Layer w40: J18.3@4043.68,4605.2 4043.68,4511.32 4115.14,4439.86 Q7.3@4115.14,4301.52
MOTOR2+: J18.2 Q8.3 U16.16 | length 973
  Top Layer w30: Q8.3@4275,4305 4275,4215 4370,4120 4370,3840 4385,3825 U16.16@4457.87,3825
  Top Layer w40: J18.2@4142.1,4605.2 4142.1,4535 4172.1,4505 4205,4505 4275,4435 Q8.3@4275,4305
MOTOR2-: J18.1 Q9.3 U16.17 | length 1126
  Top Layer w30: U16.17@4457.87,3875 4580,3875
  Top Layer w40: J18.1@4240.53,4605.2 4240.53,4574.47 4315,4500 4385.14,4500 4435.14,4450 Q9.3@4435.14,4306.52 4435.14,4194.86 4480,4150 4480,4145 4520,4105 4585,4105 4645,4045 4645,3940 4580,3875
MOTOR_1F+: R94.2 U5.3 U16.7 | length 2438.9
  Top Layer w10: U5.3@2626.85,2862.24 2626.85,2976.85 2654,3004 3290,3004 3330,3044 3330,3285 3335,3290 R94.2@3400,3290 3400,3365 v1(3405,3370) ; R94.2@3385.86,3275.86 ccw(c3351.72,3241.72) 3351.72,3290 ccw(c3351.72,3338.28) R94.2@3385.86,3304.14 ; R94.2@3385.86,3309.14 ccw(c3351.72,3343.28) 3400,3343.28 ccw(c3448.28,3343.28) R94.2@3414.14,3309.14 ; 3400,3333.79 cw(c3441.21,3333.79) v1@3412.07,3362.93 ; v1(3860,3725) U16.7@3942.13,3725 ; v1@3867.07,3717.93 cw(c3884.14,3700.86) 3884.14,3725 cw(c3884.14,3749.14) v1@3867.07,3732.07 ; U16.7@3903.85,3720.18 ccw(c3892.22,3708.56) 3892.22,3725 ccw(c3892.22,3741.44) U16.7@3903.85,3729.82
  Bottom Layer w10: v1@3397.93,3377.07 ccw(c3380.86,3394.14) 3405,3394.14 ccw(c3429.14,3394.14) v1@3412.07,3377.07 ; v1(3405,3370) 3405,3695 3435,3725 v1(3860,3725) ; v1@3852.93,3717.93 ccw(c3835.86,3700.86) 3835.86,3725 ccw(c3835.86,3749.14) v1@3852.93,3732.07
MOTOR_1F-: R99.2 U5.4 U16.9 | length 2493.7
  Top Layer w10: U5.4@2607.17,2862.24 2607.17,2993.17 2635,3021 3282.96,3021 3313,3051.04 3313,3373 3337,3397 3503,3397 v1(3510,3390) ; 3468.96,3397 cw(c3468.96,3348.96) v1@3502.93,3382.93 ; R99.2@3485.86,3309.14 ccw(c3451.72,3343.28) 3500,3343.28 ccw(c3548.28,3343.28) R99.2@3514.14,3309.14 ; 3493.1,3397 cw(c3493.1,3373.1) v1(3510,3390) ; R99.2@3500,3290 3500,3380 v1(3510,3390) ; 3500,3341.72 cw(c3558.28,3341.72) v1@3517.07,3382.93 ; 3500,3365.86 cw(c3534.14,3365.86) v1(3510,3390) ; v1(3860,3625) U16.9@3942.13,3625 ; v1@3867.07,3617.93 cw(c3884.14,3600.86) 3884.14,3625 cw(c3884.14,3649.14) v1@3867.07,3632.07 ; U16.9@3903.85,3620.18 ccw(c3892.22,3608.56) 3892.22,3625 ccw(c3892.22,3641.44) U16.9@3903.85,3629.82
  Bottom Layer w10: v1@3502.93,3397.07 ccw(c3485.86,3414.14) 3510,3414.14 ccw(c3534.14,3414.14) v1@3517.07,3397.07 ; v1(3510,3390) 3510,3600 3535,3625 v1(3860,3625) ; v1@3852.93,3617.93 ccw(c3835.86,3600.86) 3835.86,3625 ccw(c3835.86,3649.14) v1@3852.93,3632.07
MOTOR_2F+: R100.2 U5.7 U16.13 | length 3092.1
  Top Layer w10: U5.7@2548.11,2862.24 2548.11,3008.11 2595,3055 3259,3055 3279,3075 3279,3388.04 3324.96,3434 3570.04,3434 3594.04,3410 3670,3410 v1(3697.5,3382.5) 3700,3380 R100.2@3700,3290 ; R100.2@3685.86,3309.14 ccw(c3651.72,3343.28) 3700,3343.28 ccw(c3748.28,3343.28) R100.2@3714.14,3309.14 ; v1@3687.5,3382.5 ccw(c3663.36,3382.5) 3680.43,3399.57 ccw(c3697.5,3416.64) v1@3697.5,3392.5 ; v1@3690.43,3375.43 cw(c3667.32,3352.32) 3700,3352.32 ; 3700,3364.39 cw(c3715.61,3364.39) v1@3704.57,3375.43 ; v1(4380,3675) U16.13@4457.87,3675 ; v1@4387.07,3667.93 cw(c4404.14,3650.86) 4404.14,3675 cw(c4404.14,3699.14) v1@4387.07,3682.07 ; U16.13@4419.59,3670.18 ccw(c4407.97,3658.56) 4407.97,3675 ccw(c4407.97,3691.44) U16.13@4419.59,3679.82
  Bottom Layer w10: v1@3690.43,3389.57 ccw(c3673.36,3406.64) 3697.5,3406.64 ccw(c3721.64,3406.64) v1@3704.57,3389.57 ; v1(3697.5,3382.5) 3697.5,3482.5 3705,3490 4350,3490 4380,3520 v1(4380,3675) ; v1@4372.93,3667.93 cw(c4355.86,3650.86) 4380,3650.86 cw(c4404.14,3650.86) v1@4387.07,3667.93
MOTOR_2F-: R101.2 U5.5 U16.15 | length 3158.3
  Top Layer w10: U5.5@2587.48,2862.24 2587.48,3002.48 2623,3038 3275.92,3038 3296,3058.08 3296,3381 3332,3417 3563,3417 3595,3385 ccw(c3600.88,3390.88) v1@3605.02,3383.67 ; 3584.39,3395.61 ccw(c3610,3421.21) v1@3610,3385 ; R101.2@3585.86,3309.14 ccw(c3551.72,3343.28) 3600,3343.28 ccw(c3648.28,3343.28) R101.2@3614.14,3309.14 ; R101.2@3600,3290 3600,3365 v1(3610,3375) ccw(c3634.14,3350.86) 3600,3350.86 ; 3600,3326.72 cw(c3658.28,3326.72) v1@3617.07,3367.93 ; v1(4375,3775) U16.15@4457.87,3775 ; v1@4382.07,3767.93 cw(c4399.14,3750.86) 4399.14,3775 cw(c4399.14,3799.14) v1@4382.07,3782.07 ; U16.15@4419.59,3770.18 ccw(c4407.97,3758.56) 4407.97,3775 ccw(c4407.97,3791.44) U16.15@4419.59,3779.82 ; 3596.46,3383.54 cw(c3587.93,3375) 3600,3375 ccw(c3587.93,3375) 3596.46,3383.54
  Bottom Layer w10: v1@3602.93,3382.07 ccw(c3585.86,3399.14) 3610,3399.14 ccw(c3634.14,3399.14) v1@3617.07,3382.07 ; v1(3610,3375) 3610,3490 3627,3507 4312,3507 4345,3540 4345,3745 v1(4375,3775) ; v1@4365,3775 cw(c4340.86,3775) 4357.93,3757.93 cw(c4375,3740.86) v1@4375,3765
NetC7_1: C7.1 C12.1 D11.1 F1.2 | length 1325.2
  Top Layer w20: C7.1@629.39,4330.61 ccw(c603.79,4356.21) 640,4356.21 ccw(c676.21,4356.21) C7.1@650.61,4330.61 ; C7.1@640,4315 640,4490 ; 655.27,4505.27 cw(c696.67,4463.87) F1.2@734.77,4508.32 ; 670.54,4520.54 cw(c710.77,4480.32) F1.2@747.79,4523.5 ; 685.81,4535.81 cw(c724.86,4496.76) F1.2@760.81,4538.69 ; F1.2@719,4495.69 cw(c607.94,4384.63) 765,4384.63 ; F1.2@721.76,4493.14 ccw(c682.57,4447.43) 640,4490 ; F1.2@733.14,4509.83 cw(c656.23,4432.92) 765,4432.92 ; C12.1@754.39,4330.61 ccw(c728.79,4356.21) 765,4356.21 ccw(c801.21,4356.21) C12.1@775.61,4330.61 ; C12.1@765,4315 765,4568.28 F1.2@753.69,4579.59 729.59,4579.59 640,4490 ; 765,4439.26 cw(c844.8,4439.26) F1.2@788.37,4495.69
NetC30_1: C30.1 U10.3 | length 514
  Top Layer w10: C30.1@667.31,1931.54 cw(c662.5,1920) 675,1920 ; C30.1@675,1950 ccw(c690.89,1935.01) 675.44,1919.56 ; C30.1@675,1955 675,1920 ; C30.1@682.27,1943.14 ccw(c698.38,1927.94) 682.72,1912.28 ; C30.1@682.69,1931.54 ccw(c687.5,1920) 675,1920 ; C30.1@689.55,1936.27 ccw(c705.87,1920.87) 690,1905 ; U10.3@897.67,1970.19 ccw(c885.72,1958.24) 885.72,1975.14 ccw(c885.72,1992.04) U10.3@897.67,1980.09 ; U10.3@939.83,1975.14 855.14,1975.14 840,1960 840,1925 820,1905 690,1905 ; 675,1920 690,1905
NetC30_2: C30.2 U10.1 | length 491.5
  Top Layer w10: C30.2@667.31,2068.46 ccw(c662.5,2080) 675,2080 ; C30.2@675,2045 675,2080 ; C30.2@675,2050 cw(c696.33,2064.7) 678.01,2083.01 ; C30.2@682.69,2068.46 cw(c687.5,2080) 675,2080 ; C30.2@683.23,2055.67 cw(c706.39,2071.63) 686.51,2091.51 ; C30.2@691.47,2061.35 cw(c716.44,2078.55) 695,2100 ; U10.1@897.67,2070.19 ccw(c885.72,2058.24) 885.72,2075.14 ccw(c885.72,2092.04) U10.1@897.67,2080.09 ; U10.1@939.83,2075.14 874.86,2075.14 850,2100 695,2100 ; 675,2080 695,2100
NetC31_1: C31.1 U10.4 | length 287.9
  Top Layer w10: C31.1@769.85,1862.23 ccw(c759.38,1880) 780,1880 ; C31.1@780,1840 780,1880 ; C31.1@790.15,1862.23 cw(c800.62,1880) 780,1880 ; U10.4@897.67,1920.19 ccw(c885.72,1908.24) 885.72,1925.14 ccw(c885.72,1942.04) U10.4@897.67,1930.09 ; U10.4@939.83,1925.14 864.18,1925.14 827.04,1888 788,1888 780,1880
NetC31_2: C31.2 U10.5 | length 441
  Top Layer w10: C31.2@774.33,1746.77 ccw(c787.77,1766.28) C31.2@804.52,1749.52 ; C31.2@780,1750 805,1750 830,1775 ; C31.2@780,1755 ccw(c794.7,1776.33) 813.01,1758.01 ; C31.2@785.67,1763.23 ccw(c801.63,1786.39) 821.51,1766.51 ; C31.2@791.35,1771.47 ccw(c808.55,1796.44) 830,1775 ; U10.5@897.67,1870.19 ccw(c885.72,1858.24) 885.72,1875.14 ccw(c885.72,1892.04) U10.5@897.67,1880.09 ; U10.5@939.83,1875.14 840.14,1875.14 830,1865 830,1775
NetC32_1: C32.1 U11.3 | length 511.6
  Top Layer w10: C32.1@662.31,2441.54 cw(c657.5,2430) 670,2430 ; C32.1@670,2460 ccw(c685.89,2445.01) 670.44,2429.56 ; C32.1@670,2465 670,2430 ; C32.1@677.27,2453.14 ccw(c693.38,2437.94) 677.72,2422.28 ; C32.1@677.69,2441.54 ccw(c682.5,2430) 670,2430 ; C32.1@684.55,2446.27 ccw(c700.87,2430.87) 685,2415 ; U11.3@897.67,2475.19 ccw(c885.72,2463.24) 885.72,2480.14 ccw(c885.72,2497.04) U11.3@897.67,2485.09 ; U11.3@939.83,2480.14 859.18,2480.14 837.02,2457.98 837.02,2432.02 820,2415 685,2415 ; 670,2430 685,2415
NetC32_2: C32.2 U11.1 | length 455.1
  Top Layer w10: C32.2@655.86,2574.14 ccw(c621.72,2608.28) 670,2608.28 ccw(c718.28,2608.28) C32.2@684.14,2574.14 ; C32.2@670,2555 670,2615 680,2625 820,2625 865,2580 939.69,2580 U11.1@939.83,2580.14 ; 885.37,2580 ccw(c885.37,2597.38) U11.1@897.67,2585.09 ; 886.06,2580 cw(c886.06,2563.58) U11.1@897.67,2575.19
NetC33_1: C33.1 U11.4 | length 363.5
  Top Layer w10: C33.1@768.51,2373.92 ccw(c765.4,2383) 775,2383 ; C33.1@775,2350 775,2383 ; C33.1@775,2355 cw(c789.86,2368.99) 775.43,2383.43 ; C33.1@781.49,2373.92 cw(c784.6,2383) 775,2383 ; C33.1@782.28,2361.86 cw(c797.36,2376.06) 782.71,2390.71 ; C33.1@789.56,2368.71 cw(c804.87,2383.13) 790,2398 ; U11.4@897.67,2425.19 ccw(c885.72,2413.24) 885.72,2430.14 ccw(c885.72,2447.04) U11.4@897.67,2435.09 ; U11.4@939.83,2430.14 859.18,2430.14 827.04,2398 790,2398 ; 775,2383 790,2398
NetC33_2: C33.2 U11.5 | length 396.3
  Top Layer w10: C33.2@775,2260 800,2260 820,2280 ; C33.2@775,2265 ccw(c789.99,2280.89) 805.44,2265.44 ; C33.2@781.86,2272.27 ccw(c797.06,2288.38) 812.72,2272.72 ; C33.2@788.73,2279.55 ccw(c804.13,2295.87) 820,2280 ; U11.5@897.67,2375.19 ccw(c885.72,2363.24) 885.72,2380.14 ccw(c885.72,2397.04) U11.5@897.67,2385.09 ; U11.5@939.83,2380.14 830.14,2380.14 820,2370 820,2280
NetC34_1: C34.1 U12.3 | length 561.6
  Top Layer w10: C34.1@662.31,2936.54 cw(c657.5,2925) 670,2925 ; C34.1@670,2955 ccw(c685.89,2940.01) 670.44,2924.56 ; C34.1@670,2960 670,2925 ; C34.1@677.27,2948.14 ccw(c693.38,2932.94) 677.72,2917.28 ; C34.1@677.69,2936.54 ccw(c682.5,2925) 670,2925 ; C34.1@684.55,2941.27 ccw(c700.87,2925.87) 685,2910 ; U12.3@902.67,3005.19 ccw(c890.72,2993.24) 890.72,3010.14 ccw(c890.72,3027.04) U12.3@902.67,3015.09 ; U12.3@944.83,3010.14 857.14,3010.14 847,3000 847,2922 835,2910 685,2910 ; 670,2925 685,2910
NetC34_2: C34.2 U12.1 | length 435.8
  Top Layer w10: C34.2@656.6,3069.85 ccw(c629.38,3100) 670,3100 ; C34.2@670,3050 670,3100 ; C34.2@683.4,3069.85 cw(c710.62,3100) 670,3100 ; U12.1@902.67,3105.19 ccw(c890.72,3093.24) 890.72,3110.14 ccw(c890.72,3127.04) U12.1@902.67,3115.09 ; U12.1@944.83,3110.14 874.86,3110.14 860,3125 695,3125 670,3100
NetC35_1: C35.1 U12.4 | length 333.8
  Top Layer w10: C35.1@764.85,2867.23 ccw(c754.38,2885) 775,2885 ; C35.1@775,2845 775,2885 ; C35.1@785.15,2867.23 cw(c795.62,2885) 775,2885 ; U12.4@902.67,2955.19 ccw(c890.72,2943.24) 890.72,2960.14 ccw(c890.72,2977.04) U12.4@902.67,2965.09 ; U12.4@944.83,2960.14 869.14,2960.14 864,2955 864,2914.96 842.04,2893 783,2893 775,2885
NetC35_2: C35.2 U12.5 | length 392.1
  Top Layer w10: C35.2@775,2755 830,2755 835,2760 835,2855 890.14,2910.14 U12.5@944.83,2910.14 ; C35.2@789.14,2740.86 cw(c823.28,2706.72) 823.28,2755 cw(c823.28,2803.28) C35.2@789.14,2769.14 ; U12.5@902.67,2905.19 ccw(c890.72,2893.24) 890.72,2910.14 ccw(c890.72,2927.04) U12.5@902.67,2915.09
NetC36_1: C36.1 U13.3 | length 449.2
  Top Layer w10: C36.1@665,3455 cw(c665,3394.64) 707.68,3437.32 ; C36.1@665,3465 cw(c665,3428.79) 690.61,3454.39 ; C36.1@665,3480 720,3425 825,3425 875.14,3475.14 U13.3@939.83,3475.14 ; C36.1@685,3475 ccw(c721.21,3475) 695.61,3449.39 ; U13.3@897.67,3470.19 ccw(c885.72,3458.24) 885.72,3475.14 ccw(c885.72,3492.04) U13.3@897.67,3480.09
NetC36_2: C36.2 U13.1 | length 442.1
  Top Layer w10: C36.2@651.6,3589.85 ccw(c624.38,3620) 665,3620 ; C36.2@665,3570 665,3620 ; C36.2@678.4,3589.85 cw(c705.62,3620) 665,3620 ; U13.1@897.67,3570.19 ccw(c885.72,3558.24) 885.72,3575.14 ccw(c885.72,3592.04) U13.1@897.67,3580.09 ; U13.1@939.83,3575.14 879.86,3575.14 830,3625 670,3625 665,3620
NetC37_1: C37.1 U13.4 | length 264.1
  Top Layer w10: C37.1@770,3365 805,3365 ; C37.1@787.23,3354.85 cw(c805,3344.38) 805,3365 ; C37.1@787.23,3375.15 ccw(c805,3385.62) 805,3365 ; U13.4@897.67,3420.19 ccw(c885.72,3408.24) 885.72,3425.14 ccw(c885.72,3442.04) U13.4@897.67,3430.09 ; U13.4@939.83,3425.14 865.14,3425.14 805,3365
NetC37_2: C37.2 U13.5 | length 389.5
  Top Layer w10: C37.2@770,3275 780,3275 880.14,3375.14 U13.5@939.83,3375.14 ; C37.2@770,3280 ccw(c770,3316.21) 795.61,3290.61 ; C37.2@770,3290 ccw(c770,3350.36) 812.68,3307.68 ; C37.2@770,3300 ccw(c770,3384.5) 829.75,3324.75 ; C37.2@790,3280 cw(c802.07,3280) C37.2@793.54,3288.54 ; U13.5@897.67,3370.19 ccw(c885.72,3358.24) 885.72,3375.14 ccw(c885.72,3392.04) U13.5@897.67,3380.09
NetC50_1: C50.1 U10.2 | length 383
  Top Layer w10: C50.1@774.33,1951.77 ccw(c787.77,1971.28) C50.1@804.52,1954.52 ; C50.1@780,1955 805,1955 830,1980 ; C50.1@780,1960 ccw(c794.7,1981.33) 813.01,1963.01 ; C50.1@785.67,1968.23 ccw(c801.63,1991.39) 821.51,1971.51 ; C50.1@791.35,1976.47 ccw(c808.55,2001.44) 830,1980 ; U10.2@897.67,2020.19 ccw(c885.72,2008.24) 885.72,2025.14 ccw(c885.72,2042.04) U10.2@897.67,2030.09 ; U10.2@939.83,2025.14 845.14,2025.14 830,2010 830,1980
NetC51_1: C51.1 U10.6 | length 504.5
  Top Layer w10: C51.1@663,1729 cw(c645,1705) 675,1705 ; C51.1@675,1750 675,1705 ; C51.1@687,1729 ccw(c705,1705) 675,1705 ; U10.6@897.67,1820.19 ccw(c885.72,1808.24) 885.72,1825.14 ccw(c885.72,1842.04) U10.6@897.67,1830.09 ; U10.6@939.83,1825.14 857.14,1825.14 847,1815 847,1722 820,1695 685,1695 675,1705
NetC52_1: C52.1 U11.2 | length 312.7
  Top Layer w10: C52.1@775,2465 820,2465 ; C52.1@789.85,2451.6 cw(c820,2424.38) 820,2465 ; C52.1@789.85,2478.4 ccw(c820,2505.62) 820,2465 ; U11.2@897.67,2525.19 ccw(c885.72,2513.24) 885.72,2530.14 ccw(c885.72,2547.04) U11.2@897.67,2535.09 ; U11.2@939.83,2530.14 840.14,2530.14 835,2525 835,2480 820,2465
NetC53_1: C53.1 U11.6 | length 512.7
  Top Layer w10: C53.1@656.6,2240.15 cw(c629.38,2210) 670,2210 ; C53.1@670,2260 670,2210 ; C53.1@683.4,2240.15 ccw(c710.62,2210) 670,2210 ; U11.6@897.67,2325.19 ccw(c885.72,2313.24) 885.72,2330.14 ccw(c885.72,2347.04) U11.6@897.67,2335.09 ; U11.6@939.83,2330.14 852.14,2330.14 837,2315 837,2232 815,2210 670,2210
NetC54_1: C54.1 U12.2 | length 324.6
  Top Layer w10: C54.1@775,2960 810,2960 ; C54.1@792.23,2949.85 cw(c810,2939.38) 810,2960 ; C54.1@792.23,2970.15 ccw(c810,2980.62) 810,2960 ; U12.2@902.67,3055.19 ccw(c890.72,3043.24) 890.72,3060.14 ccw(c890.72,3077.04) U12.2@902.67,3065.09 ; U12.2@944.83,3060.14 835.14,3060.14 830,3055 830,2980 810,2960
NetC55_1: C55.1 U12.6 | length 532.8
  Top Layer w10: C55.1@658,2734 cw(c640,2710) 670,2710 ; C55.1@670,2755 670,2710 ; C55.1@682,2734 ccw(c700,2710) 670,2710 ; U12.6@902.67,2855.19 ccw(c890.72,2843.24) 890.72,2860.14 ccw(c890.72,2877.04) U12.6@902.67,2865.09 ; U12.6@944.83,2860.14 877.14,2860.14 852,2835 852,2732 820,2700 680,2700 670,2710
NetC56_1: C56.1 U13.2 | length 290.9
  Top Layer w10: C56.1@770,3480 830,3480 875.14,3525.14 U13.2@939.83,3525.14 ; C56.1@784.14,3465.86 cw(c818.28,3431.72) 818.28,3480 cw(c818.28,3528.28) C56.1@784.14,3494.14 ; U13.2@897.67,3520.19 ccw(c885.72,3508.24) 885.72,3525.14 ccw(c885.72,3542.04) U13.2@897.67,3530.09
NetC57_1: C57.1 R56.1 R57.1 U13.6 | length 1405.5
  Top Layer w10: C57.1@653,3254 cw(c635,3230) 665,3230 ; C57.1@665,3275 665,3230 ; C57.1@677,3254 ccw(c695,3230) 665,3230 ; U13.6@897.67,3320.19 ccw(c885.72,3308.24) 885.72,3325.14 ccw(c885.72,3342.04) U13.6@897.67,3330.09 ; U13.6@981.99,3320.19 cw(c993.94,3308.24) 993.94,3325.14 cw(c993.94,3342.04) U13.6@981.99,3330.09 ; v1@1032.79,3318.07 ccw(c1015.72,3301) 1015.72,3325.14 ccw(c1015.72,3349.28) v1@1032.79,3332.21 ; v1(1039.86,3325.14) U13.6@939.83,3325.14 865.14,3325.14 835,3295 835,3250 810,3225 670,3225 665,3230 ; v1@1250,3255 cw(c1250,3230.86) 1267.07,3247.93 cw(c1284.14,3265) v1@1260,3265 ; v1(1250,3265) 1295,3220 ; R56.1@1312.77,3209.85 ccw(c1295,3199.38) 1295,3220 ; R56.1@1312.77,3230.15 cw(c1295,3240.62) 1295,3220 ; R56.1@1344.14,3205.86 cw(c1378.28,3171.72) 1378.28,3220 cw(c1378.28,3268.28) R56.1@1344.14,3234.14 ; R57.1@1440.86,3205.86 ccw(c1406.72,3171.72) 1406.72,3220 ccw(c1406.72,3268.28) R57.1@1440.86,3234.14 ; R57.1@1455,3215 1450,3220 R56.1@1330,3220 1295,3220
  Bottom Layer w10: v1(1039.86,3325.14) 1189.86,3325.14 v1(1250,3265) ; v1@1046.93,3318.07 cw(c1064,3301) 1064,3325.14 cw(c1064,3349.28) v1@1046.93,3332.21 ; v1@1240,3265 ccw(c1215.86,3265) 1232.93,3282.07 ccw(c1250,3299.14) v1@1250,3275
NetC64_1: C64.1 R105.2 U16.14 | length 552.5
  Top Layer w30: U16.14@4457.87,3725 4515,3725 ; U16.14@4489.6,3727.68 cw(c4500.65,3710.65) 4515,3725 ; U16.14@4491.34,3728.19 cw(c4491.34,3678.76) 4526.29,3713.71 ; 4551.11,3688.89 ccw(c4645,3782.78) C64.1@4645,3650 ; 4602.32,3637.68 ccw(c4645,3680.36) C64.1@4645,3620 ; R105.2@4645,3525 C64.1@4645,3635 4605,3635 4515,3725
NetC66_2: C66.2 R104.2 U16.8 | length 411.8
  Top Layer w20: C66.2@3660,3685 3670,3675 U16.8@3942.13,3675 ; C66.2@3670.61,3690.61 ccw(c3708.28,3728.28) 3708.28,3675 ; 3721.72,3675 ccw(c3721.72,3728.28) R104.2@3759.39,3690.61 ; R104.2@3780.61,3690.61 ccw(c3818.28,3728.28) 3818.28,3675
NetD2_1: D2.1 R17.2 | length 333.6
  Top Layer w10: R17.2@3790,755 3840,755 ; R17.2@3809.85,741.6 cw(c3840,714.38) 3840,755 ; R17.2@3809.85,768.4 ccw(c3840,795.62) 3840,755 ; D2.1@3939.22,672.52 ccw(c3909.09,645.33) 3909.09,685.91 ; D2.1@3939.22,699.31 cw(c3909.09,726.5) 3909.09,685.91 ; D2.1@3959.07,685.91 3909.09,685.91 ; 3840,755 3909.09,685.91
NetD3_1: D3.1 R18.2 | length 341.1
  Top Layer w10: R18.2@3790,860 3850,860 3899.09,810.91 D3.1@3959.07,810.91 ; R18.2@3809.14,845.86 cw(c3843.28,811.72) 3843.28,860 cw(c3843.28,908.28) R18.2@3809.14,874.14 ; D3.1@3939.93,796.77 ccw(c3905.79,762.63) 3905.79,810.91 ccw(c3905.79,859.2) D3.1@3939.93,825.06
NetD4_1: D4.1 R19.2 | length 332.8
  Top Layer w10: R19.2@3790,965 3875,965 3904.09,935.91 D4.1@3959.07,935.91 ; R19.2@3809.14,950.86 cw(c3843.28,916.72) 3843.28,965 cw(c3843.28,1013.28) R19.2@3809.14,979.14 ; D4.1@3939.93,921.77 ccw(c3905.79,887.63) 3905.79,935.91 ccw(c3905.79,984.2) D4.1@3939.93,950.06
NetD5_1: D5.1 R20.2 | length 352.4
  Top Layer w10: R20.2@3790,1070 3794.09,1065.91 D5.1@3959.07,1065.91 ; R20.2@3802.07,1077.07 ccw(c3829.01,1104.01) 3829.01,1065.91 ; R20.2@3809.14,1055.86 cw(c3833.42,1031.58) 3833.42,1065.91 ; R20.2@3809.14,1084.14 ccw(c3853.15,1128.15) 3853.15,1065.91 ; D5.1@3939.93,1051.77 ccw(c3905.79,1017.63) 3905.79,1065.91 ccw(c3905.79,1114.2) D5.1@3939.93,1080.06
NetD6_1: D6.1 R21.2 | length 327.4
  Top Layer w10: R21.2@3790,1175 3850,1175 3865.91,1190.91 D6.1@3959.07,1190.91 ; R21.2@3809.14,1160.86 cw(c3843.28,1126.72) 3843.28,1175 cw(c3843.28,1223.28) R21.2@3809.14,1189.14 ; D6.1@3939.93,1176.77 ccw(c3905.79,1142.63) 3905.79,1190.91 ccw(c3905.79,1239.2) D6.1@3939.93,1205.06
NetD7_1: D7.1 R22.2 | length 330.6
  Top Layer w10: R22.2@3790,1280 3845,1280 3880.91,1315.91 D7.1@3954.07,1315.91 ; R22.2@3809.14,1265.86 cw(c3843.28,1231.72) 3843.28,1280 cw(c3843.28,1328.28) R22.2@3809.14,1294.14 ; D7.1@3934.93,1301.77 ccw(c3900.79,1267.63) 3900.79,1315.91 ccw(c3900.79,1364.2) D7.1@3934.93,1330.06
NetD8_1: D8.1 R14.2 | length 238.2
  Top Layer w20: R14.2@2360,4140 2360.93,4139.07 D8.1@2484.09,4139.07 ; R14.2@2370.61,4129.39 cw(c2393.97,4106.03) 2393.97,4139.07 ; R14.2@2370.61,4150.61 ccw(c2398.46,4178.46) 2398.46,4139.07 ; D8.1@2473.48,4128.46 ccw(c2447.87,4102.86) 2447.87,4139.07 ccw(c2447.87,4175.28) D8.1@2473.48,4149.68
NetD9_1: D9.1 R15.2 | length 237.9
  Top Layer w20: R15.2@2585,4139.07 D9.1@2709.09,4139.07 ; R15.2@2595.61,4128.46 cw(c2621.21,4102.86) 2621.21,4139.07 cw(c2621.21,4175.28) R15.2@2595.61,4149.68 ; D9.1@2698.48,4128.46 ccw(c2672.87,4102.86) 2672.87,4139.07 ccw(c2672.87,4175.28) D9.1@2698.48,4149.68
NetD10_1: D10.1 R16.2 | length 237.9
  Top Layer w20: R16.2@2130,4139.07 D10.1@2254.09,4139.07 ; R16.2@2140.61,4128.46 cw(c2166.21,4102.86) 2166.21,4139.07 cw(c2166.21,4175.28) R16.2@2140.61,4149.68 ; D10.1@2243.48,4128.46 ccw(c2217.87,4102.86) 2217.87,4139.07 ccw(c2217.87,4175.28) D10.1@2243.48,4149.68
NetD12_2: D12.2 L1.1 U2.2 | length 1613.3
  Top Layer w50: L1.1@1447.74,3680.88 ccw(c1372.8,3755.82) 1478.78,3755.82 ccw(c1584.76,3755.82) L1.1@1509.82,3680.88 ; v1(1855,4305) 1952.7,4402.7 D12.2@1952.7,4440.6 ; 1883.22,4333.22 ccw(c1775.85,4440.6) D12.2@1927.7,4440.6 ; D12.2@1968.58,4418.58 ccw(c1946.56,4440.6) D12.2@1977.7,4440.6
  Top Layer w60: U2.2@1119.41,3846.46 1452.69,3846.46 1478.78,3820.36 L1.1@1478.78,3705
  Bottom Layer w60: v1(1465,3820) 1855,4210 v1@1855,4300
NetD14_1: D14.1 R49.1 | length 287.5
  Top Layer w10: D14.1@480.93,679.09 594.09,679.09 R49.1@595,680 ; D14.1@500.07,664.94 cw(c534.21,630.8) 534.21,679.09 cw(c534.21,727.37) D14.1@500.07,693.23 ; 539.51,679.09 ccw(c539.51,730.49) R49.1@575.86,694.14 ; 543.92,679.09 cw(c543.92,633.92) R49.1@575.86,665.86 ; 563.65,679.09 ccw(c563.65,706.35) R49.1@582.93,687.07
NetD16_1: D16.1 R50.1 | length 287.5
  Top Layer w10: D16.1@480.93,804.09 594.09,804.09 R50.1@595,805 ; D16.1@500.07,789.94 cw(c534.21,755.8) 534.21,804.09 cw(c534.21,852.37) D16.1@500.07,818.23 ; 539.51,804.09 ccw(c539.51,855.49) R50.1@575.86,819.14 ; 543.92,804.09 cw(c543.92,758.92) R50.1@575.86,790.86 ; 563.65,804.09 ccw(c563.65,831.35) R50.1@582.93,812.07
NetD17_1: D17.1 R51.1 | length 287.5
  Top Layer w10: D17.1@480.93,929.09 594.09,929.09 R51.1@595,930 ; D17.1@500.07,914.94 cw(c534.21,880.8) 534.21,929.09 cw(c534.21,977.37) D17.1@500.07,943.23 ; 539.51,929.09 ccw(c539.51,980.49) R51.1@575.86,944.14 ; 543.92,929.09 cw(c543.92,883.92) R51.1@575.86,915.86 ; 563.65,929.09 ccw(c563.65,956.35) R51.1@582.93,937.07
NetD18_1: D18.1 R52.1 | length 287.5
  Top Layer w10: D18.1@480.93,1054.09 594.09,1054.09 R52.1@595,1055 ; D18.1@500.07,1039.94 cw(c534.21,1005.8) 534.21,1054.09 cw(c534.21,1102.37) D18.1@500.07,1068.23 ; 539.51,1054.09 ccw(c539.51,1105.49) R52.1@575.86,1069.14 ; 543.92,1054.09 cw(c543.92,1008.92) R52.1@575.86,1040.86 ; 563.65,1054.09 ccw(c563.65,1081.35) R52.1@582.93,1062.07